# EAGLE board BMS_watchdog (EAGLE 7.7.0)
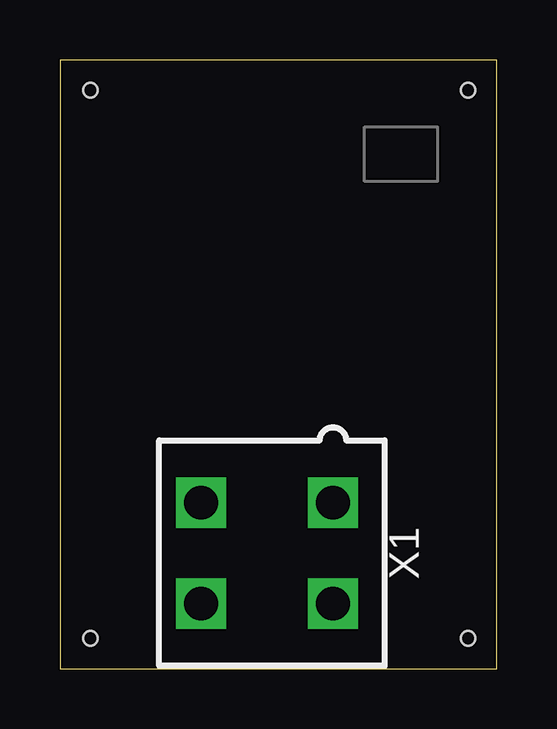
[diagram p0: board, top side]
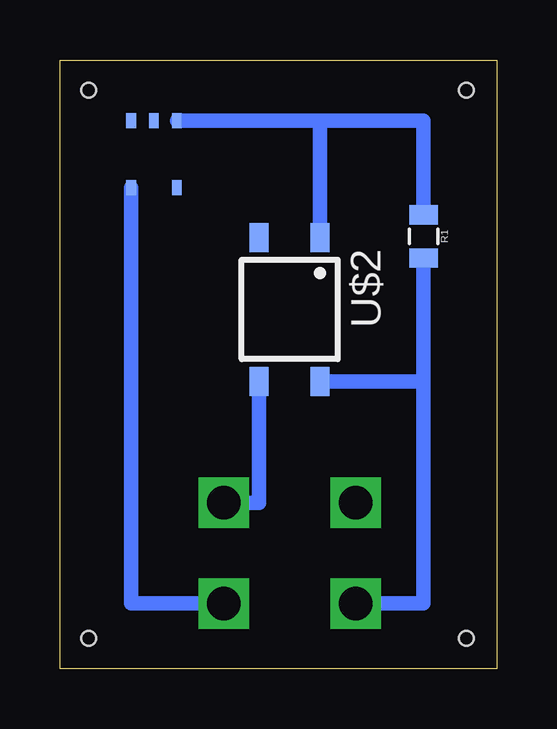
[diagram p1: board, bottom side, seen from below]

Size 18.21 x 25.39 mm. Coordinates in mm from the lower left corner, seen from the top.
Outline: 0,0 18.21,0 18.21,25.39 0,25.39 0,0
Copper layers (1*16): Top 0.035mm / dielectric 1.5mm / Bottom 0.035mm
Design rules "default": minimum track width 10mil, minimum drill 24mil, track to track 8mil, track to pad 8mil, pad to pad 8mil, via to via 8mil, smd to smd 8mil, copper to edge 40mil, drill to drill 8mil, minimum pad ring 10mil, minimum via ring 8mil, stop-mask expansion 4mil, vias tented up to drill 0mil, thermal gap 10mil
Holes 0.6 mm at 1.27,24.13 17.02,24.13 17.02,1.27 1.27,1.27

## Footprints (pad centres in the part's own frame; a part is rotated, then mirrored left to right if it is on the bottom)
0805 = smd 0.8 x 1.2: 1 -0.9,0; 2 0.9,0
SOT23-5 = smd 0.61 x 0.406: EN -2.794,0; GND -2.794,0.94; VCC 0,1.905; WDI 0,0; WDO -2.794,1.905
SOP04 = smd 0.8 x 1.2: 1 -1.27,-3; 2 1.27,-3; 3 1.27,3; 4 -1.27,3
MINIFIT_5566-4 = drill 1.4 square: 1 2.1,-2.75; 2 -2.1,-2.75; 3 2.1,2.75; 4 -2.1,2.75

## Placement (x,y rotation side)
R1  [0805]  3.05,18.03 270 bottom
U$1  STWD100  [SOT23-5]  15.24,20.07 270 bottom
U$2  CPC1002N  [SOP04]  8.64,14.99 180 bottom
X1  MINIFIT_5566-4  [MINIFIT_5566-4]  8.64,4.83 90 top

## Library data of the parts
R1 U$1 U$2 = HyTechDevices
X1 = HyTechDevices; OC_FARNELL: unknown; OC_NEWARK: unknown

## Nets
N$1: R1.2 U$2.4 X1.4
N$2: U$1.WDI X1.2
N$3: R1.1 U$1.WDO U$2.1
N$5: U$2.3 X1.1
N$6: U$2.2

## Tracks (layer width: path | path; a pad name or v marks a point on that pad's centre or on a via)
N$1
  Bottom 0.61: 3.05,11.99 3.05,2.73 X1.4 | R1.2 3.05,11.99 | 3.05,11.99 U$2.4
N$2
  Bottom 0.61: X1.2 15.24,2.73 U$1.WDI
N$3
  Bottom 0.61: R1.1 3.05,22.86 7.37,22.86 | 7.37,22.86 U$1.WDO | U$2.1 7.37,22.86
N$5
  Bottom 0.61: U$2.3 9.91,6.93 X1.1